# Altium PCB PCB1.PcbDoc
Units mil, origin at the board's own origin, x right, y up, seen from the top; angles counter-clockwise.
Board outline 2110 x 1310 mil, 2 copper layers (Top Layer, Bottom Layer); 13 components, 6 nets, 33 pads, 0 vias.
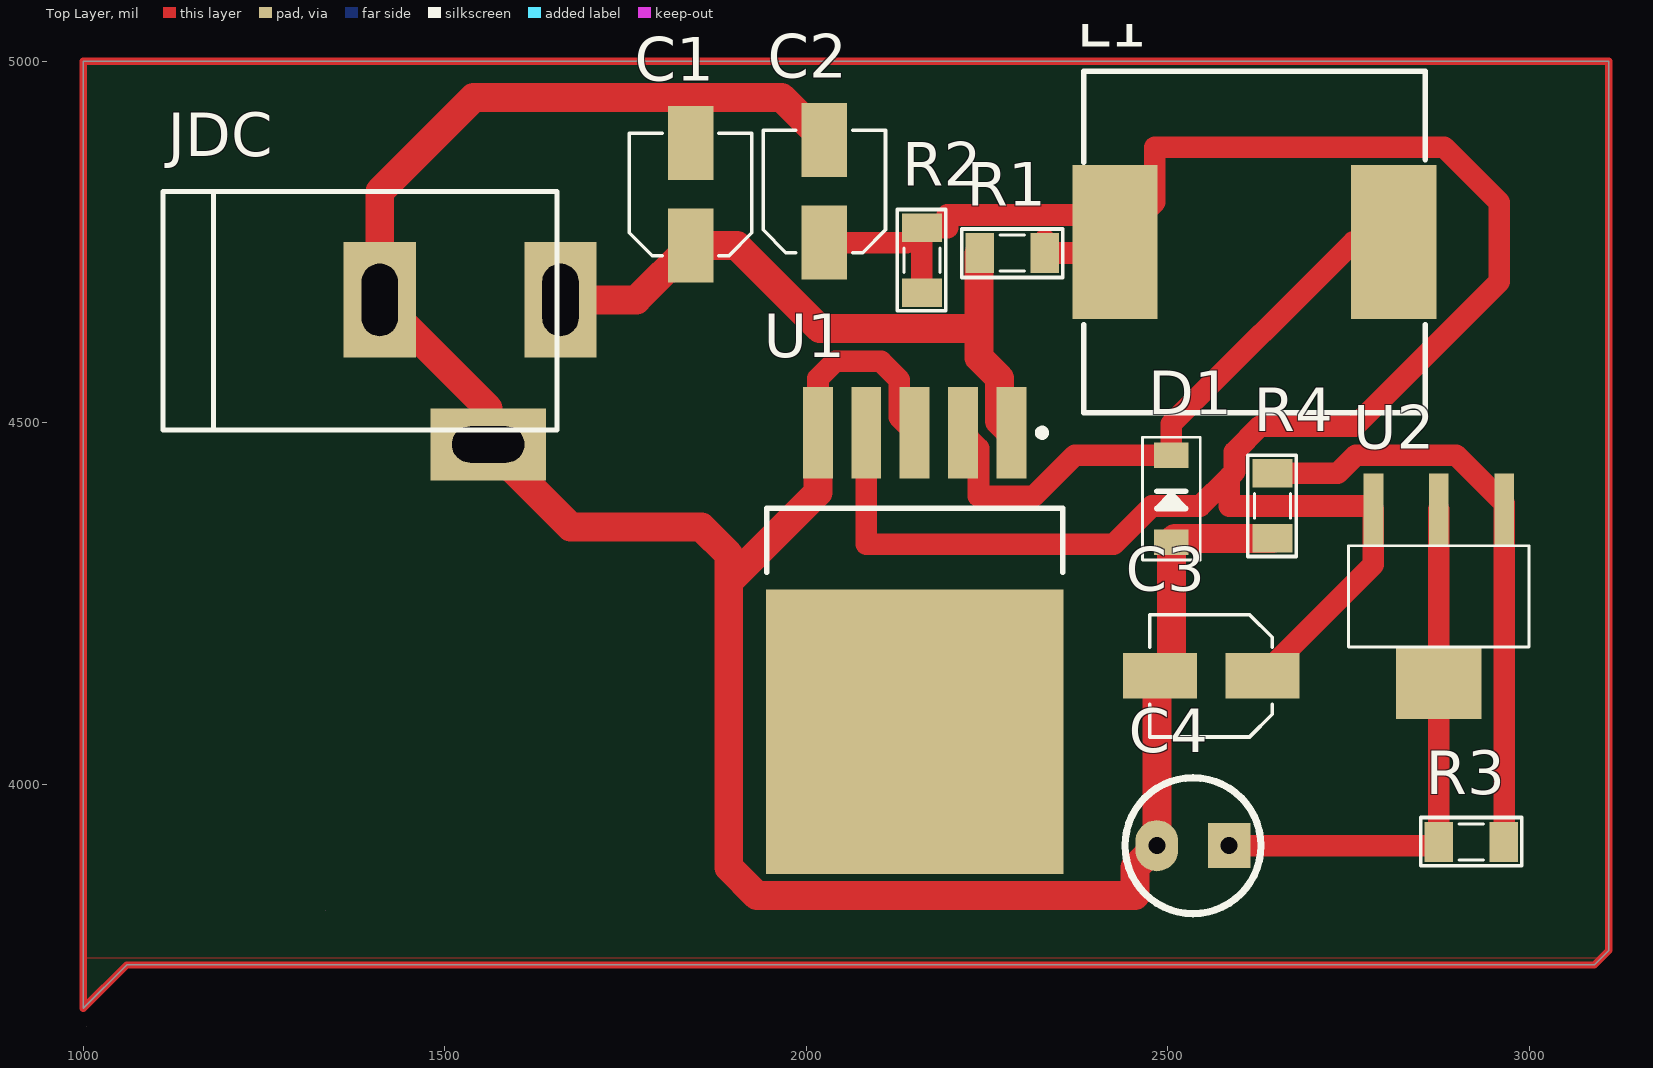
[diagram p0: Top Layer view]
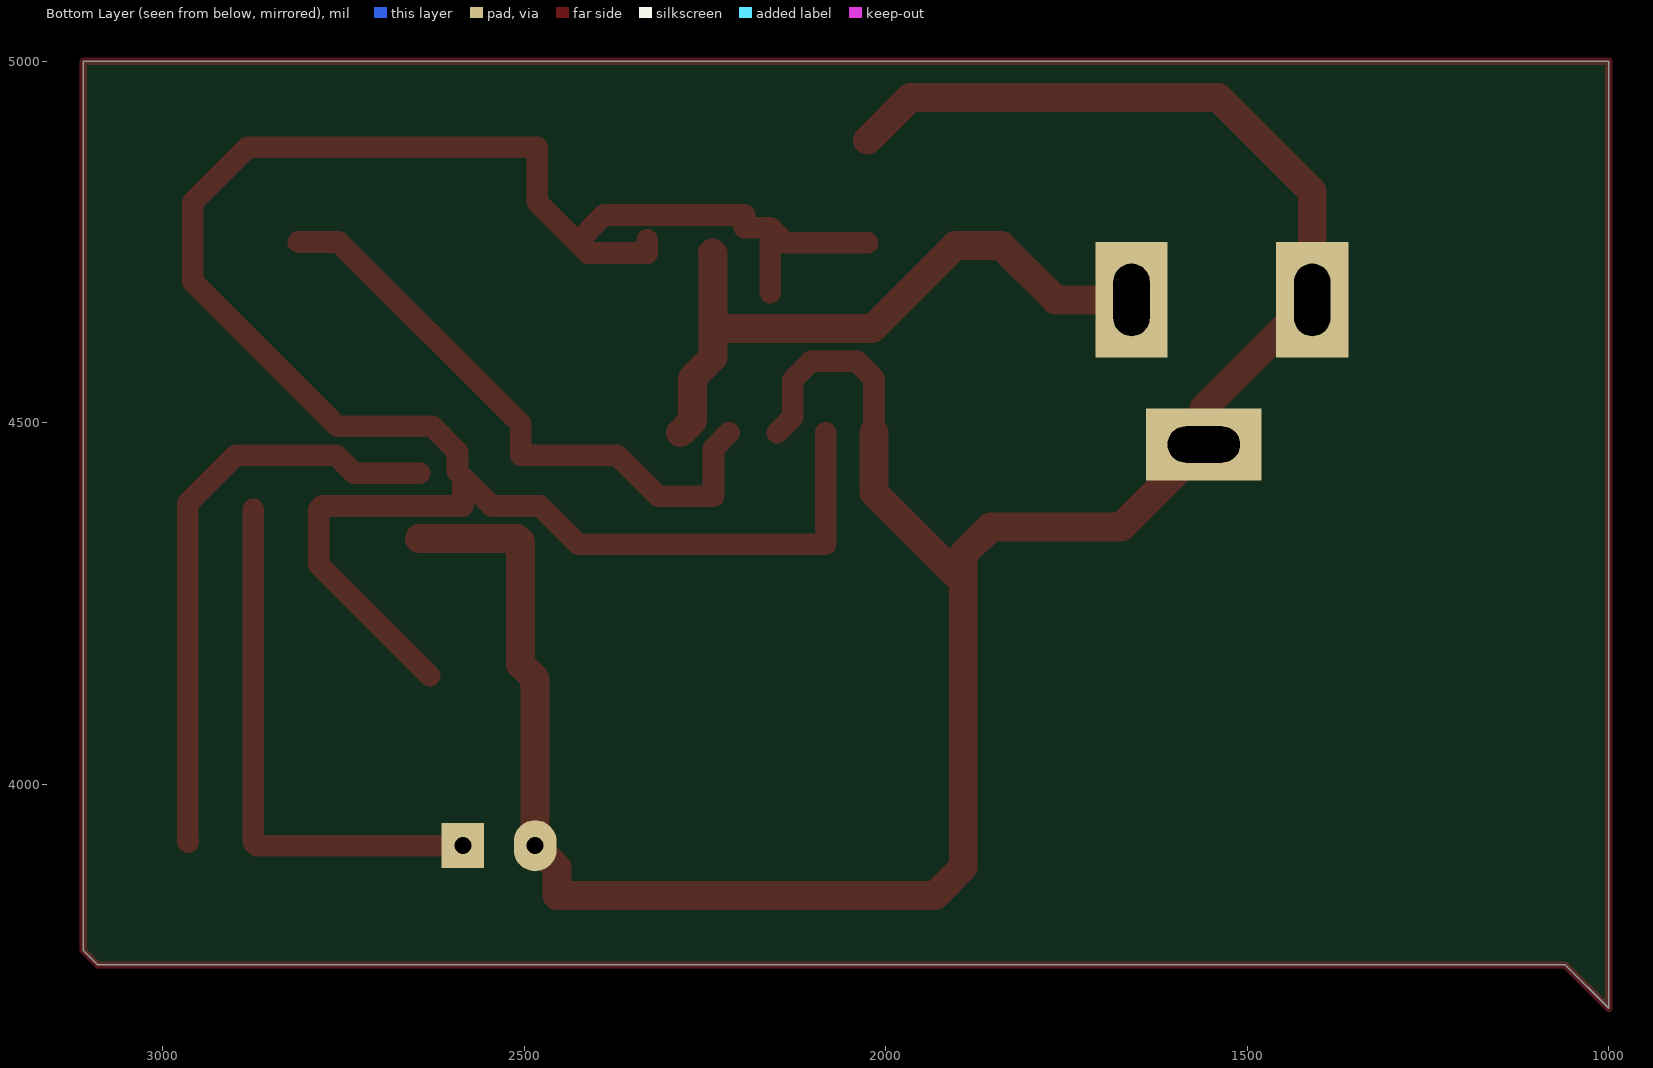
[diagram p1: Bottom Layer view, seen from below]
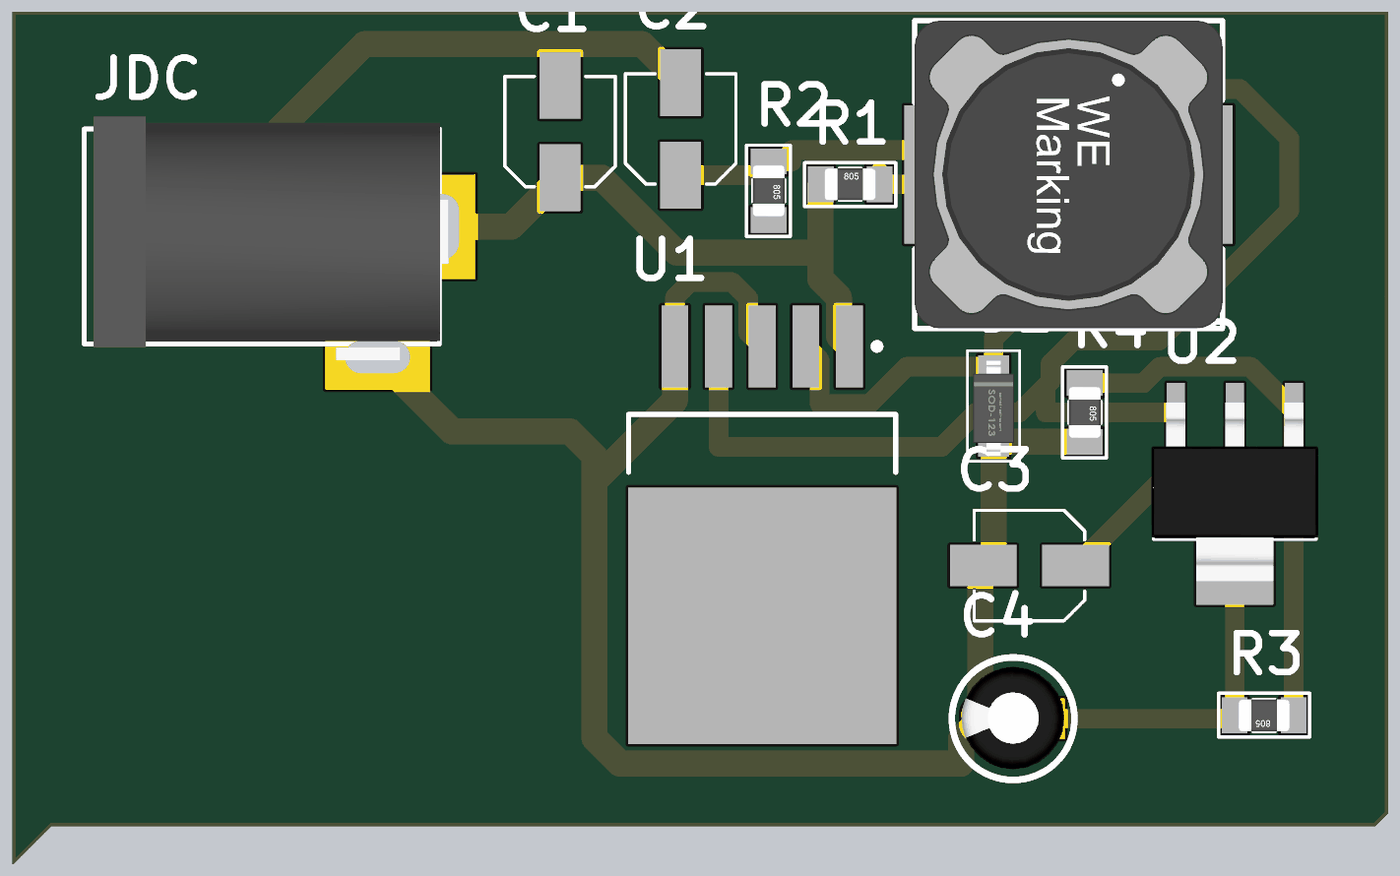
[diagram p2: 3D render of the assembled board from above, using the file's embedded part models]

## Layer stack, top to bottom
Top Solder: solder mask 0.4, Solder Resist, Dk 3.5
Top Layer: signal copper 1.4
Dielectric 1: dielectric 12.6, FR-4, Dk 4.8
Bottom Layer: signal copper 1.4
Bottom Solder: solder mask 0.4, Solder Resist, Dk 3.5

## Board outline
1000,3690 1060,3750 3090,3750 3110,3770 3110,5000 1000,5000
cut-out: 1005,3665
cut-out: 1335,3825

## Design rules (kind name [scope] priority, off if disabled: settings)
Clearance [All] p1: gap=10 ignorepadtopadclearanceinfootprint=TRUE
PolygonConnect [All] p1: connectstyle=Relief reliefconductorwidth=10 reliefentries=4 polygonreliefangle="90 Angle" airgapwidth=10
RoutingVias [All] p1: holewidth=28 width=50 viastyle="Through Hole" minholewidth=28 minwidth=50 maxholewidth=28 maxwidth=50
SolderMaskExpansion [All] p1: expansion=4
Width [All] p1: maxlimit=40 minlimit=15 preferedwidth=30
30 further rules are at their usual default settings.

## Components (designator, comment, footprint, x,y, rotation, side; value= is the part's Value field where it differs from the comment)
C1 "100uF" CAP-ALU-SMD-4.5x5x1.4 1840,4815.87 r90 top
C2 "220uF" CAP-ALU-SMD-4.5x5x1.4 2025,4820 r90 top
C3 "10uF" CAP-ALU-SMD-4.5x5x1.4 2560,4150 r180 top
C4 "22uF" CA-ALU-2.54 2535,3915 r180 top value=104
D1 "1N5822" DIO-SMD-123 2505,4395 r270 top value="Diode c?m 1N5408"
JDC "Jac DC" DC-IN 1535,4570 r0 top
L1 "22uH" L-SMD-M-12x10 2620,4750 r270 top value="150 mH"
R1 "1k" RES-SMD-0805 2285,4735 r0 top
R2 "3k" RES-SMD-0805 2160,4725 r270 top
R3 "1k" RES-SMD-0805 2920,3920 r180 top
R4 "1.7k" RES-SMD-0805 2645,4385 r270 top
U1 "LM2976" TO-263 2150,4250 r270 top
U2 "LM1117-ADJ" LM1117-SOP 2875,4330 r180 top

## Footprints (in the part's own frame and the unit in brackets; to place one, negate y for a bottom-side part, rotate by r counter-clockwise, add the part's x,y. Pads: shape width x height; smd on the part's side, far side on the other; paste and mask are expansions set on the pad)
CA-ALU-2.54 [mm]
  rect 1.5x1.58 hole 0.6: 1(-1.27,0)
  oval 1.5x1.8 hole 0.6: 2(1.27,0)
  silkscreen extent -2.39,-2.39 2.39,2.39, body extent -2,-2.03 1.99,1.97, height 7.01
CAP-ALU-SMD-4.5x5x1.4 [mm]
  rect 2.6x1.6 smd: 1(-1.8,0) 2(1.8,0)
  silkscreen extent -2.15,-2.15 2.15,2.15, body extent -2.5,-2.15 2.5,2.15, height 5.45
DC-IN [mil] "Jac DC input"
  rect 100x160 hole 50 slot 100 at 90 deg: 1(125,100) 2(-125,100)
  rect 160x100 hole 50 slot 100 at 0 deg: 3(25,-100)
  silkscreen extent -425,-80 120,250, body extent -410,-105 134,269, height 434
DIO-SMD-123 [mm]
  rect 0.9x1.2 smd: 1(1.524,0) 2(-1.524,0)
  silkscreen extent -2.16,-1.02 2.16,1.02, body extent -1.76,-0.8 1.94,0.8, height 1.25
L-SMD-M-12x10 [mm] "WE-PDA SMD Shielded Power Inductor, 1210"
  rect 5.4x3 smd: 1(0,4.9) 2(0,-4.9)
  silkscreen extent -6,-6 6,6, body extent -6,-6 6,6, height 9.7
LM1117-SOP [mm]
  rect 0.7x2.54 smd: 1(-2.3,-1.27) 2(0,-1.27) 3(2.3,-1.27)
  rect 3x2.54 smd: 2(0,4.826)
  silkscreen extent -3.18,0 3.17,3.56, body extent -3.25,-1.78 3.25,5.18, height 1.68
RES-SMD-0805 [mil]
  rect 39.37x55 smd: 1(-45,0) 2(45,0)
  silkscreen extent -70,-34 70,33, body extent -39,-25 39,25, height 31
TO-263 [mm]
  rect 3.2x1.05 smd: 1(-6,3.4) 2(-6,1.7) 3(-6,0) 4(-6,-1.7) 5(-6,-3.4)
  rect 10x10.45 smd: 6(4.5,0)
  silkscreen extent -6.12,-5.2 -1.1,5.2, body extent -6.58,-5.2 7.57,5.2, height 4.65

## Part data
C1 C2 C3: library part CAP-ALU-SMD, "Polarized Capacitor (Axial)", LatestRevisionDate=17-Jul-2002, LatestRevisionNote="Re-released for DXP Platform.", PackageReference=POLAR0.8, Published=8-Jun-2000, Publisher="Altium Limited"
C4: library part CAP-ALU-DIP, "Capacitor (Semiconductor SIM Model)", LatestRevisionDate=17-Jul-2002, LatestRevisionNote="Re-released for DXP Platform.", PackageReference=C1206, Publisher="Altium Limited"
D1: "Schottky Rectifiers"
JDC: library part DCIN, "Jac DC input"
L1: library part Inductor, "Inductor"
R1 R2 R3 R4: library part "Resistor - SMD", "Resistor SMD", Manufacturer="Generic Components", Class=Passive, Published=08/06/2000, Publisher="Altium Hobart Technology Centre"
U1: library part LM2596, Max Input Voltage="12 V", Max Output Current="3 (6.0 peak) A", Max Output Voltage=mV, Temperature Range="-40 to +125 degC", Category=IC-Power, Min Input Voltage=mV, Min Output Voltage=mV, Mounting Technology="Surface Mount", Status=Unreleased, Supply Voltage=mV
U2: "800mA Low-Dropout Linear Regulator", Creator="Nguyen Ba Bien", Website=http://group3i.net

## Nets (pads, with @x,y where several pads share a name; then routed paths per layer and width w, separated by ;. In a path a pad name is that pad's centre, name@x,y a point inside that pad or via, vN(x,y) a via of type N, cw(c..) or ccw(c..) an arc to the next point about the centre after c; other vN are vias at no path point)
3.3V: C4.1 R3.2 U2.2 | length 752.1
  Top Layer w30: C4.1 2870,3915 R3.2 2875,4140 U2.2@2875,4380
+5: C2.1 C3.1 L1.2 R1.2 R2.1 R2.2 U1.4 U2.3 | length 3158.7
  Top Layer w30: C2.1 2139.13,4749.13 R2.1 ; U1.4 2083.07,4331.93 2425.24,4331.93 2478.31,4385 2545,4385 2585,4425 ; R2.2 R2.1 ; R1.2@2330,4752.91 R1.2 2412.09,4735 L1.2 ; C3.1 2784.45,4303.58 U2.3 2779.45,4385 2585,4385 2585,4425 ; R2.1 2195.31,4770 2195.31,4787.5 2389.59,4787.5 L1.2 ; L1.2 2482.09,4805 2482.09,4881.3 2882.32,4881.3 2958.62,4805 2958.62,4695 2758.62,4495 2627.46,4495 2592.5,4460.04 2592.5,4432.5 2585,4425
+12: C1.1 JDC.1 R1.1 U1.1 | length 927.6
  Top Layer w40: JDC.1 1765,4670 C1.1 1904.03,4745 2018.71,4630.32 2233.92,4630.32 2239.24,4625 ; R1.1 2239.24,4734.24 2239.24,4625 ; U1.1 2267.6,4502.48 2267.6,4561.64 2239.24,4590 2239.24,4625
GND: C1.2 C2.2 C3.2 C4.2 D1.1 JDC.2 JDC.3 R4.2 U1.3 U1.5 | length 3711.8
  Top Layer w30: U1.5 2016.14,4561.14 2040,4585 2103.31,4585 2128.74,4559.57 2128.74,4507.48 U1.3
  Top Layer w40: U1.5 2016.14,4403.29 1892.85,4280 ; C2.2 1965.87,4950 1705.87,4950 1540,4950 1410,4820 JDC.2 1560,4520 JDC.3 1674.17,4355.83 1855,4355.83 1892.85,4317.98 1892.85,4280 ; R4.2 2510,4340 D1.1 2505,4165.87 C3.2 2485,4145.87 C4.2 2455,3885 2455,3845.98 1931.86,3845.98 1892.85,3885 1892.85,4280
NetD1_2: D1.2 L1.1 U1.2 | length 842.7
  Top Layer w30: U1.2 2238.19,4464.96 2238.19,4398.23 2314.88,4398.23 2371.65,4455 D1.2 2505,4498.43 2756.57,4750 L1.1
NetR3_1: R3.1 R4.1 U2.1 | length 827.2
  Top Layer w30: R4.1 2735.32,4430 2760.31,4455 2899.13,4455 2965.55,4388.58 U2.1 2965.55,3920.55 R3.1
pads on no net: U1.6
copper on no net: | length 6793.1
  Top Layer w10: 1000,3690 1060,3750 3090,3750 3110,3770 3110,5000 1000,5000 1000,3690

## Polygon pours and split planes (outlines as drawn)
GND on Top Layer (solid, remove dead copper, pour order 2): 1000,5000 1000,3760 3100,3760 3110,3770 3110,5000
GND on Top Layer (hatched Horizontal grid 20 track 8, remove dead copper, pour order 0): 99999,3445